# EAGLE board databank (EAGLE 6.4)
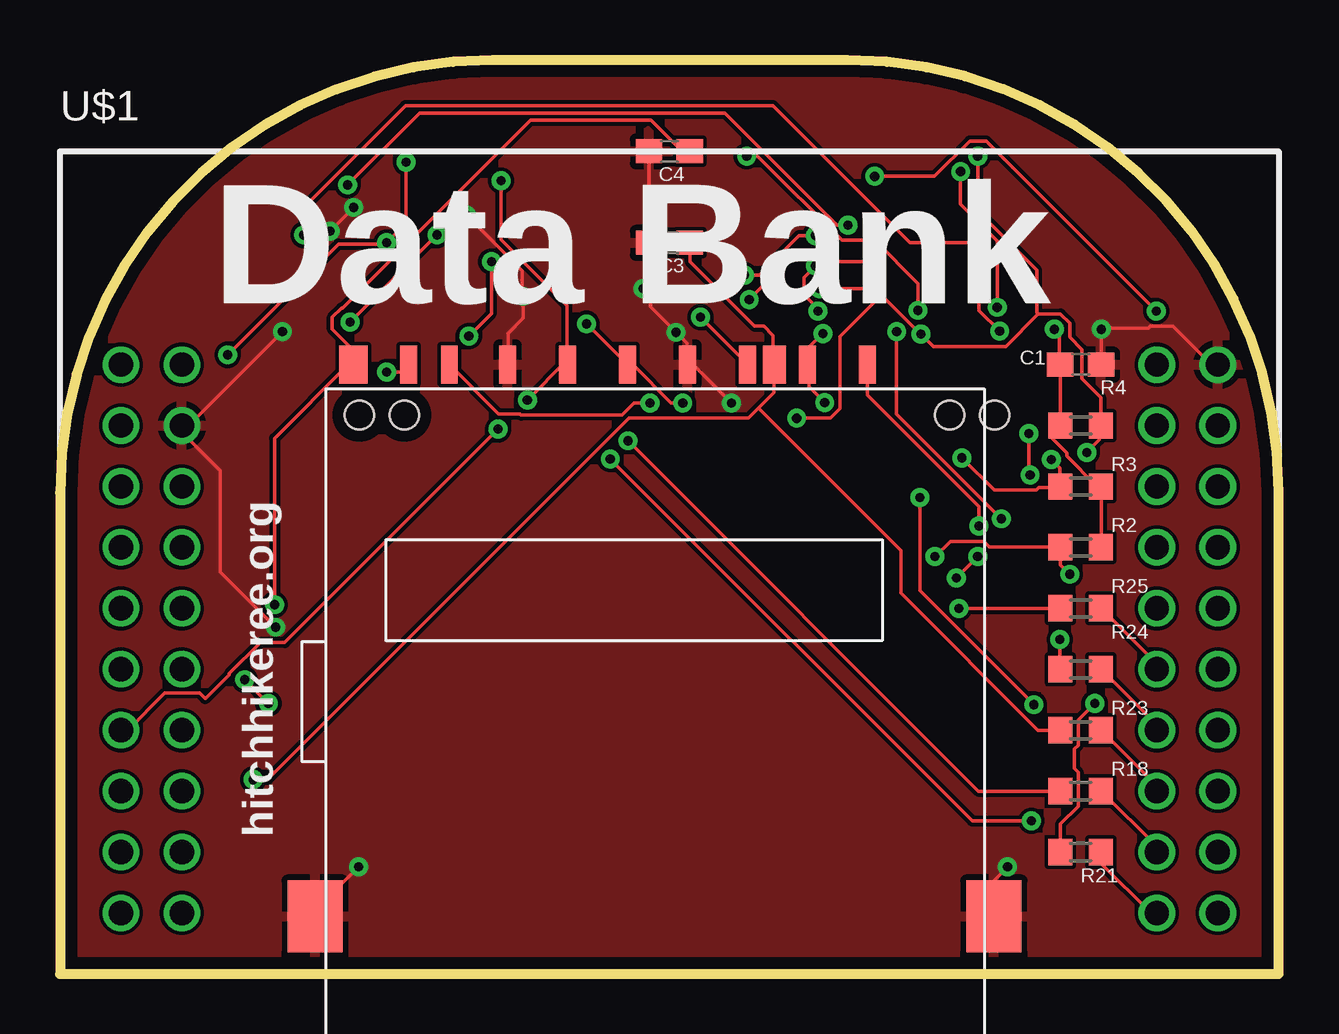
[diagram p0: board, top side]
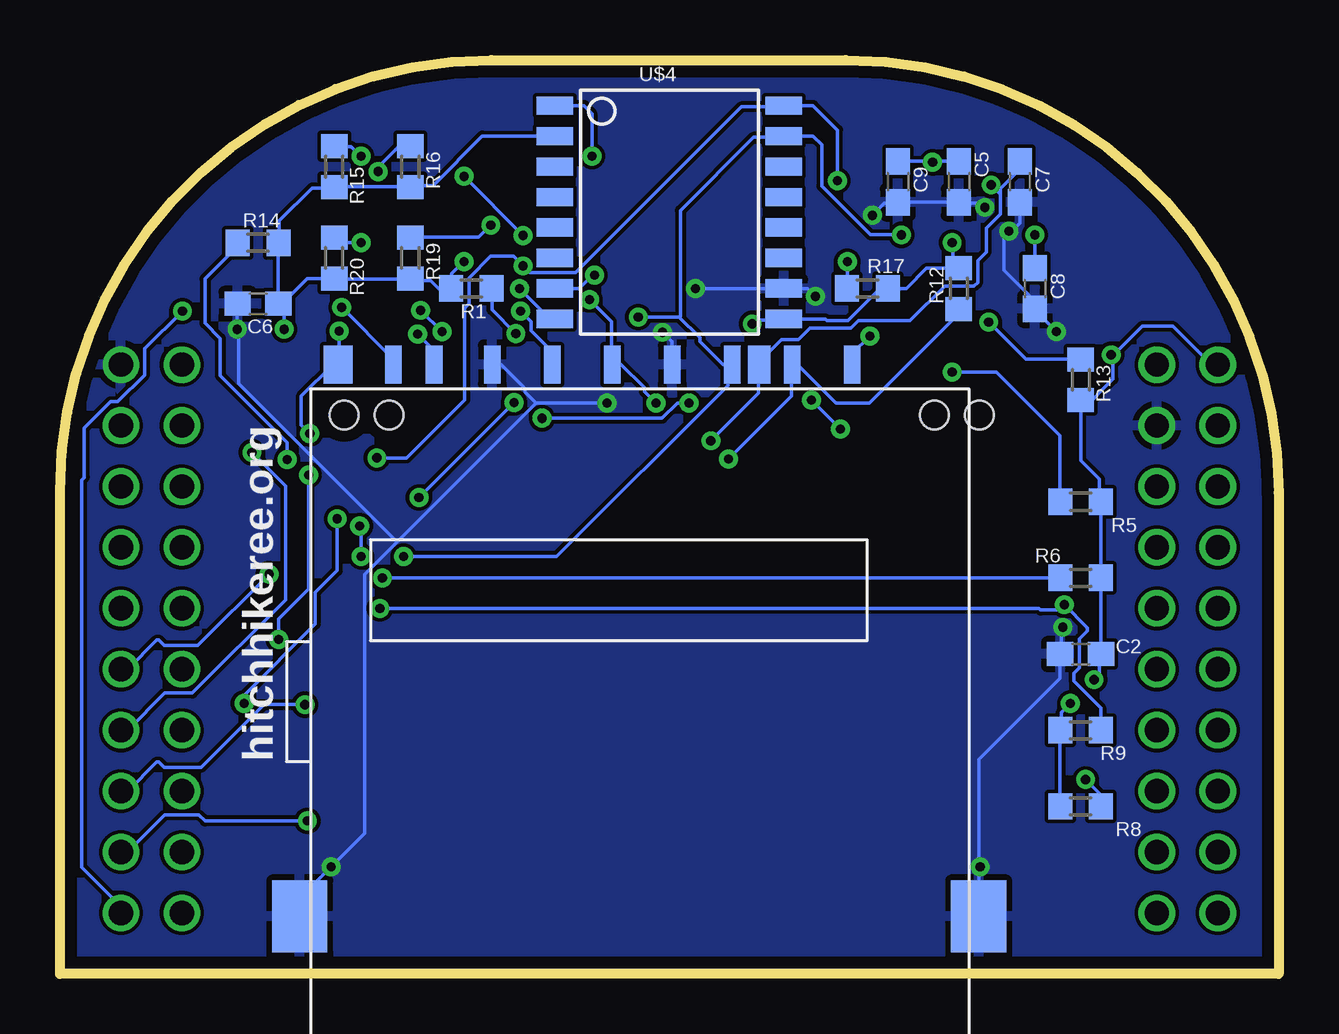
[diagram p1: board, bottom side, seen from below]

Size 50.8 x 38.1 mm. Coordinates in mm from the lower left corner, seen from the top.
Outline: 50.8,0 50.8,20.12 arc90 32.82,38.1 18.05,38.1 arc90 0,20.05 0,0 50.8,0
Copper layers (1*16): Top 0.035mm / dielectric 1.5mm / Bottom 0.035mm
Design rules "default *": minimum track width 6mil, minimum drill 15mil, track to track 6mil, track to pad 6mil, pad to pad 6mil, via to via 6mil, smd to smd 6mil, copper to edge 20mil, drill to drill 6mil, minimum pad ring 10mil, minimum via ring 8mil, stop-mask expansion 4mil, vias tented up to drill 25mil, thermal gap 10mil
Net classes: 0 default: width 0.152 mm, drill 0.381 mm, clearance 0.152 mm; 1 pwr: width 0.305 mm, drill 0.381 mm, clearance 0.152 mm

## Footprints (pad centres in the part's own frame; a part is rotated, then mirrored left to right if it is on the bottom)
C0603 = smd 1.1 x 1: 1 -0.85,0; 2 0.85,0
R0603 = smd 1 x 1.1: 1 -0.85,0; 2 0.85,0
LAUNCHPAD_BOOSTER_PACK = drill 1.016: 5V -20.32,8.89; AN@ -20.32,1.27; AN@1 -20.32,3.81; AN@3 -20.32,-1.27; AN@4 -20.32,-3.81; AN@5 -20.32,-6.35; AN@6 -20.32,-8.89; AN@7 -20.32,-11.43; AN@8 -20.32,-13.97; AN_IN -22.86,6.35; GND@1 -20.32,6.35; GND@2 22.86,8.89; GPIO@1 -22.86,-8.89; GPIO@2 -22.86,-11.43; GPIO@3 -22.86,-13.97; GPIO@4 22.86,-8.89; GPIO@5 22.86,-11.43; GPIO@6 22.86,-13.97; GPIO_INT@1 -22.86,-1.27; GPIO_INT@2 22.86,3.81; RESET 22.86,-1.27; SPIA_SCLK -22.86,-3.81; SPIB_SCLK -22.86,-6.35; SPIB_SIMO/I2C_SDA 22.86,-3.81; SPIB_SOMI/I2C_SCL 22.86,-6.35; TEST 22.86,1.27; TIM@1 20.32,8.89; TIM@2 20.32,6.35; TIM@3 20.32,3.81; TIM@4 20.32,1.27; TIM@5 20.32,-1.27; TIM@6 20.32,-3.81; TIM@7 20.32,-6.35; TIM@8 20.32,-8.89; TIM@9 20.32,-11.43; TIM@10 20.32,-13.97; TIM_OUT 22.86,6.35; UART_HW_RX -22.86,3.81; UART_HW_TX -22.86,1.27; VCC -22.86,8.89
101-00405-75 = smd 0.7 x 1.6: 1 -2.5,0; 2 -5,0; 3 -7.5,0; 4 -10,0; 5 -12.5,0; 6 -15,0; 7 -17.425,0; 8 -19.125,0; 9 0,0 | smd 0.95 x 1.6: CD -3.875,0 | smd 2.3 x 3: G1$GND -23.025,-23; G2$GND 5.275,-23 | smd 1.2 x 1.6: WP -21.43,0 | hole 1.2: -21.175,-2.1; 3.425,-2.1
SO-16LD = smd 0.762 x 1.524: 1 -4.445,-4.775; 2 -3.175,-4.775; 3 -1.905,-4.775; 4 -0.635,-4.775; 5 0.635,-4.775; 6 1.905,-4.775; 7 3.175,-4.775; 8 4.445,-4.775; 9 4.445,4.775; 10 3.175,4.775; 11 1.905,4.775; 12 0.635,4.775; 13 -0.635,4.775; 14 -1.905,4.775; 15 -3.175,4.775; 16 -4.445,4.775

## Placement (x,y rotation side)
C1  0.1u  [C0603]  42.55,25.4 0 top
C2  10u  [C0603]  8.26,13.33 180 bottom
C3  0.1u  [C0603]  25.4,30.48 180 top
C4  0.1u  [C0603]  25.4,34.29 180 top
C5  0.1u  [C0603]  13.34,33.02 270 bottom
C6  10u  [C0603]  42.55,27.94 180 bottom
C7  0.1u  [C0603]  10.8,33.02 270 bottom
C8  0.1u  [C0603]  10.16,28.57 270 bottom
C9  0.1u  [C0603]  15.88,33.02 270 bottom
R1  10K  [R0603]  33.66,28.57 180 bottom
R2  10K  [R0603]  42.55,17.78 0 top
R3  10K  [R0603]  42.55,20.32 0 top
R4  10K  [R0603]  42.55,22.86 180 top
R5  10K  [R0603]  8.26,19.69 0 bottom
R6  10K  [R0603]  8.26,16.51 0 bottom
R8  10K  [R0603]  8.26,6.98 180 bottom
R9  10K  [R0603]  8.26,10.16 180 bottom
R12  10K  [R0603]  13.34,28.57 90 bottom
R13  10K  [R0603]  8.26,24.77 270 bottom
R14  10K  [R0603]  42.55,30.48 0 bottom
R15  10K  [R0603]  39.37,33.65 270 bottom
R16  10K  [R0603]  36.2,33.65 270 bottom
R17  10K  [R0603]  17.14,28.57 0 bottom
R18  33  [R0603]  42.55,7.62 0 top
R19  10K  [R0603]  36.2,29.84 270 bottom
R20  10K  [R0603]  39.37,29.84 270 bottom
R21  33  [R0603]  42.55,5.08 0 top
R23  33  [R0603]  42.55,10.16 0 top
R24  33  [R0603]  42.55,12.7 0 top
R25  33  [R0603]  42.55,15.24 0 top
U$1  [LAUNCHPAD_BOOSTER_PACK]  25.4,16.51 0 top
U$2  101-00405-75  [101-00405-75]  33.66,25.4 0 top
U$3  101-00405-75  [101-00405-75]  17.78,25.4 0 bottom
U$4  [SO-16LD]  25.4,31.75 270 bottom

## Library data of the parts
C1 C3-C5 C7-C9 = rcl; MPN: VJ0603V104ZXXCW1BC
C2 C6 = rcl; MPN: LMK107BBJ106MALT
R1-R6 R8 R9 R12-R17 R19 R20 = rcl; MPN: WR06X1002FTL
R18 R21 R23-R25 = rcl; MPN: CR0402-JW-330GLF
U$1 = Boards
U$2 U$3 = launchpad_bp; MPN: 101-00405-75
U$4 = launchpad_bp; MPN: MX25L25635E

## Nets
+3V3: C1.1 C2.1 C5.1 C6.1 C9.1 R1.2 R2.2 R3.2 R4.2 R5.2 R6.2 R8.2 R9.2 R12.2 R13.2 R14.2 R15.2 R16.2 R17.2 R19.2 R20.2 U$1.VCC U$2.4 U$3.4 U$4.2 U$4.9
+5V: U$1.5V
FLASH_!CS: U$1.GPIO@6 U$4.7
FLASH_!HOLD: R21.1 U$4.1
GND: C1.2 C2.2 C3.2 C4.2 C5.2 C6.2 C7.2 C8.2 C9.2 U$1.GND@1 U$1.GND@2 U$2.3 U$2.6 U$2.G1$GND U$2.G2$GND U$3.3 U$3.6 U$3.G1$GND U$3.G2$GND U$4.10
MISO: R4.1 R15.1 U$1.SPIB_SOMI/I2C_SCL U$2.7 U$3.7 U$4.8
MOSI: R2.1 R13.1 U$1.SPIB_SIMO/I2C_SDA U$2.2 U$3.2 U$4.15
N$2: R16.1 U$3.8
N$3: R17.1 U$3.9
N$5: R5.1 U$2.8
N$6: R6.1 U$2.9
N$8: R21.2 U$1.TIM@10
N$9: R18.2 U$1.TIM@9
N$11: R23.2 U$1.TIM@8
N$12: R24.2 U$1.TIM@7
N$13: R25.2 U$1.TIM@6
SCLK: R3.1 R14.1 U$1.SPIB_SCLK U$2.5 U$3.5 U$4.16
SD0_!CD: C3.1 R8.1 R23.1 U$2.CD
SD0_!CS: R1.1 U$1.GPIO@4 U$2.1
SD0_!WP: C4.1 R9.1 R25.1 U$2.WP
SD1_!CD: C7.1 R18.1 R19.1 U$3.CD
SD1_!CS: R12.1 U$1.GPIO@5 U$3.1
SD1_!WP: C8.1 R20.1 R24.1 U$3.WP

## Tracks (layer width: path | path; a pad name or v marks a point on that pad's centre or on a via)
+3V3  (via drill 0.38)
  Top 0.152: R2.2 43.41,17.78 43.41,20.32 R3.2 43.33,20.34 43.2,20.34 41.96,21.59 41.96,21.72 41.3,22.38 41.3,22.53 41.63,22.86 R4.2 41.71,22.86 41.71,25.4 C1.1 41.66,25.45 41.66,26.67 v41.45,26.87 | v21.95,27.1 U$2.4 23.72,25.38 23.9,25.38 25.48,23.8 v25.96,23.8 | v14.43,33.83 14.43,31.29 v13.61,30.48 13.56,30.43 11.61,30.43 v6.98,25.81 | v7.7,12.27 v8.69,11.28 | v33.96,29.69 32.21,29.69 31.75,30.15 30.76,30.15 v28.73,28.12
  Bottom 0.152: U$4.2 33.2,34.92 35.26,32.87 36.14,32.87 R16.2 36.2,32.82 39.37,32.82 R15.2 39.42,32.77 40.28,32.77 41.66,31.39 41.66,30.53 R14.2 41.71,30.48 41.71,27.94 C6.1 | C6.1 41.66,28.27 41.2,28.27 40.49,28.98 39.37,28.98 R20.2 39.32,28.96 36.25,28.96 R19.2 36.2,28.98 36.12,28.9 35.36,28.9 35.03,28.57 R1.2 34.47,28.63 34.47,29.18 v33.96,29.69 | v41.45,26.87 41.45,28.22 C6.1 | 14.43,33.88 15.88,33.88 C9.1 | 14.43,33.88 13.34,33.88 C5.1 | v21.95,27.1 21.79,27.25 20.68,27.25 U$4.9 18.9,27.3 18.82,27.23 17.96,27.23 16.64,28.55 16.36,28.55 R17.2 15.52,28.57 14.68,29.41 13.34,29.41 R12.2 13.59,29.46 13.59,30.45 v13.61,30.48 | v25.96,23.8 26.44,24.28 26.44,24.43 27.41,25.4 U$3.4 27.81,25.45 27.81,27.2 v28.73,28.12 | v14.43,33.83 14.43,33.88 | R8.2 9.12,6.98 9.12,10.16 R9.2 9.07,10.21 9.07,10.9 v8.69,11.28 | v7.7,12.27 7.47,12.5 7.47,13.28 C2.1 7.42,13.33 7.42,16.51 R6.2 7.42,16.56 7.42,19.69 R5.2 7.47,19.74 7.47,20.62 8.26,21.41 R13.2 8.2,23.49 6.91,24.79 6.91,25.78 | U$1.VCC 2.82,25.4 4.42,27 5.69,27 6.91,25.78 | v6.98,25.81 6.96,25.81 6.91,25.78
FLASH_!CS  (via drill 0.38)
  Top 0.152: v28.52,29.13 29.16,29.13 30.81,30.78 v31.5,30.78 | v33.96,33.25 36.45,33.25 37.92,34.72 38.61,34.72 v45.69,27.63
  Bottom 0.152: U$4.7 29.16,28.57 28.6,29.13 v28.52,29.13 | v33.96,33.25 v31.5,30.78 | v45.69,27.63 47.27,26.06 47.27,24.97 48.39,23.85 48.69,23.85 49.78,22.76 49.78,20.7 49.89,20.6 49.89,4.44 48.26,2.82 U$1.GPIO@6
FLASH_!HOLD  (via drill 0.38)
  Top 0.152: v43.13,11.28 42.44,10.59 42.44,9.53 42.29,9.37 42.29,8.56 42.44,8.41 42.44,6.98 41.71,6.25 41.71,5.08 R21.1 | v39.24,18.97 34.87,23.34 v34.87,26.77 | v35.76,27.66 35.76,28.78 33.96,30.58 32.59,30.58 29.08,34.09 v28.63,34.09
  Bottom 0.152: v43.13,11.28 43.13,11.61 40.16,14.58 40.16,15.9 39.24,16.81 v39.24,18.97 | v35.76,27.66 v34.87,26.77 | v28.63,34.09 28.63,35.86 28.96,36.2 U$4.1
GND  (via drill 0.38)
  Top 0.152: U$2.G1$GND 10.67,2.49 10.67,2.69 v12.45,4.47 | v11.25,30.96 v12.24,31.95 | v9.27,26.77 5.36,22.86 U$1.GND@1 5.41,22.81 5.41,22.25 6.68,20.98 6.68,16.76 v8.99,14.45 | C1.2 43.41,25.4 v43.41,26.87 43.46,26.92 45.36,26.92 45.44,27 46.38,27 47.98,25.4 U$1.GND@2 | U$2.G2$GND 38.94,2.49 38.94,3.91 v39.5,4.47 | U$2.6 18.67,25.4 18.67,26.7 19.3,27.33 v19.3,28.24 19.25,28.3 19.25,29.31 v16.94,31.62 | C4.2 24.56,34.29 24.56,30.48 C3.2 24.61,30.43 24.61,28.57 | v27.99,23.8 26.19,25.6 U$2.3 26.14,25.4 26.14,26.29 v25.68,26.75 24.61,27.81 24.61,28.57 | 24.61,28.57 v24.31,28.57
  Bottom 0.152: 12.5,4.47 U$3.G2$GND 12.52,2.41 | 12.5,4.47 12.5,8.94 9.12,12.32 9.12,13.33 C2.2 9.07,13.39 9.07,14.38 v8.99,14.45 | v12.45,4.47 12.5,4.47 | 11.18,30.91 10.8,31.29 C7.2 | 11.18,30.91 11.45,30.63 11.45,29.34 10.16,28.04 C8.2 10.16,27.66 v9.27,26.77 | v12.24,31.95 12.42,32.13 13.28,32.13 C5.2 13.34,32.18 15.88,32.18 C9.2 15.93,32.13 16.43,32.13 v16.94,31.62 | v11.25,30.96 11.23,30.96 11.18,30.91 | C6.2 43.41,27.94 v43.41,26.87 43.36,26.82 43.36,24.61 36.75,18.01 | 40.82,2.41 U$3.G1$GND 40.79,2.41 40.79,3.17 v39.5,4.47 38.1,5.87 38.1,16.66 36.75,18.01 | v19.3,28.24 19.63,28.57 U$4.10 v24.31,28.57 | v25.68,26.75 25.3,26.36 25.3,25.4 U$3.3 | U$3.6 32.41,25.4 31.42,24.41 31.42,24.26 30.96,23.8 | v27.99,23.8 30.96,23.8 | 30.96,23.8 36.75,18.01
  pour Top: -24.13,49.45 75.72,49.45 75.72,-7.85 -25.27,-7.85 -25.27,49.56
  pour Bottom: -24.26,48.54 76.02,48.54 76.02,-7.95 -24.87,-7.95 -24.87,48.23
MISO  (via drill 0.38)
  Top 0.152: 40.77,27.51 41.71,27.51 42.09,27.13 42.09,26.54 42.6,26.03 42.6,24.82 43.38,24.03 43.38,22.86 R4.1 43.33,22.81 43.33,22.28 v42.8,21.74 | 40.77,27.51 39.42,26.16 36.4,26.16 v35.89,26.67 35.84,26.7 34.24,28.3 | v38.25,34.09 38.25,31.8 40.72,29.34 40.72,27.56 40.77,27.51 | v31.65,28.57 33.96,28.57 34.24,28.3 | v24.59,23.8 23.93,23.8 23.42,23.29 19.23,23.29 19.18,23.34 18.29,23.34 U$2.7 | v30.71,23.16 32.11,23.16 32.51,23.57 32.51,26.57 34.24,28.3
  Bottom 0.152: v35.89,26.67 35.23,26.01 35.23,25.4 U$3.7 | v38.25,34.09 38.66,34.49 39.37,34.49 R15.1 | U$4.8 30.38,27.3 v31.65,28.57 | v24.59,23.8 25.07,23.8 25.7,23.16 v30.71,23.16 | U$1.SPIB_SOMI/I2C_SCL 47.98,10.16 46.43,11.71 45.29,11.71 41.4,15.6 41.4,20.34 v42.8,21.74
MOSI  (via drill 0.38)
  Top 0.152: v42.09,16.66 41.71,17.04 41.71,17.78 R2.1 41.63,17.8 38.73,17.8 38.51,18.03 37.11,18.03 v36.47,17.4 | v26.7,27.38 28.68,25.4 U$2.2 | v15.72,30.81 v12.09,27.18
  Bottom 0.152: v42.09,16.66 45.06,13.69 46.46,13.69 46.69,13.92 46.76,13.92 47.98,12.7 U$1.SPIB_SIMO/I2C_SDA | 24.99,27.38 24.13,26.52 24.13,26.36 23.16,25.4 U$3.2 22.96,25.35 22.96,24.54 30.1,17.4 v36.47,17.4 | v26.7,27.38 24.99,27.38 | v12.09,27.18 10.54,25.63 8.26,25.63 R13.1 | v15.72,30.81 17.02,30.81 19.05,32.84 19.05,34.57 19.41,34.92 U$4.15 20.68,34.87 21.89,34.87 24.94,31.83 24.94,27.43 24.99,27.38
N$2  (via drill 0.38)
  Top 0.152: v37.54,33.45 37.54,32.08 39.06,30.56 v39.06,27.79
  Bottom 0.152: v37.54,33.45 37.54,33.63 36.68,34.49 36.2,34.49 R16.1 | v39.06,27.79 36.91,25.63 U$3.8
N$3  (via drill 0.38)
  Top 0.152: v17.98,29.69 17.98,27.53 v17.04,26.59
  Bottom 0.152: v17.98,29.69 17.98,28.57 R17.1 | v17.04,26.59 17.78,25.86 U$3.9
N$5  (via drill 0.38)
  Top 0.152: v13.61,25.09 14.22,25.09 U$2.8
  Bottom 0.152: v13.61,25.09 11.76,25.09 9.12,22.45 9.12,19.69 R5.1
N$6  (via drill 0.38)
  Top 0.152: v38.25,17.4 v37.36,16.51 | v38.3,18.67 38.3,19.48 33.66,24.13 U$2.9
  Bottom 0.152: v37.36,16.51 R6.1 | v38.25,17.4 38.25,18.62 v38.3,18.67
N$8
  Top 0.152: U$1.TIM@10 45.47,2.54 43.41,4.6 43.41,5.08 R21.2
N$9
  Top 0.152: U$1.TIM@9 45.72,5.31 43.41,7.62 R18.2
N$11
  Top 0.152: U$1.TIM@8 45.72,7.85 43.41,10.16 R23.2
N$12
  Top 0.152: U$1.TIM@7 45.72,10.39 43.41,12.7 R24.2
N$13
  Top 0.152: U$1.TIM@6 45.72,12.93 43.41,15.24 R25.2
SCLK  (via drill 0.38)
  Top 0.152: v41.33,21.44 41.68,21.08 41.68,20.32 R3.1 41.63,20.27 40.79,20.27 40.69,20.17 38.94,20.17 v37.59,21.51 | v18.39,33.07 18.39,30.61 21.13,27.86 21.13,25.4 U$2.5 21.08,25.53 v19.48,23.93 | v31.6,27.63 31.6,27.74 31.01,28.32 31.01,29.03 v31.5,29.52 | U$1.SPIB_SCLK 2.82,10.16 4.37,11.71 5.82,11.71 6.04,11.48 6.07,11.48 7.06,12.47 7.06,12.52 8.36,13.82 9.37,13.82 v18.26,22.71
  Bottom 0.152: v41.33,21.44 41.33,22.15 44.12,24.94 44.12,26.49 44.75,27.13 44.75,28.98 43.41,30.33 43.41,30.48 R14.1 | v18.39,33.07 18.39,35.18 19.41,36.2 U$4.16 20.68,36.14 22.4,36.14 29.31,29.23 31.22,29.23 v31.5,29.52 31.9,29.92 32.84,29.92 33.76,29.01 33.76,27.94 33.93,27.76 33.93,23.93 36.35,21.51 v37.59,21.51 | v31.6,27.63 31.17,27.2 31.17,26.82 30.3,25.96 30.3,25.4 U$3.5 | v19.48,23.93 v18.26,22.71
SD0_!CD  (via drill 0.38)
  Top 0.152: v8.05,8.1 8.66,8.1 23.72,23.16 28.7,23.16 29.12,23.58 | 29.12,23.58 29.77,24.23 29.77,25.4 U$2.CD 29.72,25.45 29.72,26.62 29.34,27 28.96,27 26.26,29.69 C3.1 | R23.1 40.77,10.16 35.05,15.87 35.05,17.65 29.12,23.58
  Bottom 0.152: v8.05,8.1 7.42,7.47 7.42,6.98 R8.1
SD0_!CS  (via drill 0.38)
  Top 0.152: v31.8,26.7 31.17,26.06 U$2.1 31.22,25.35 31.22,24.49 v31.88,23.82 | v35.84,19.86 35.84,15.98 v40.59,11.23
  Bottom 0.152: v31.8,26.7 32.79,27.69 32.79,28.57 R1.1 | v35.84,19.86 v31.88,23.82 | v40.59,11.23 42.29,11.23 44.91,8.61 46.46,8.61 46.69,8.84 46.76,8.84 47.98,7.62 U$1.GPIO@4
SD0_!WP  (via drill 0.38)
  Top 0.152: v8.94,15.39 8.94,22.33 12.01,25.4 U$2.WP 12.09,25.45 12.09,26.14 11.35,26.87 11.35,27.38 11.73,27.76 11.79,27.76 19.61,35.59 24.64,35.59 25.93,34.29 C4.1 | v37.46,15.24 R25.1
  Bottom 0.152: R9.1 7.42,10.16 7.42,11.1 8.53,12.22 8.53,12.52 8.31,12.75 8.31,13.97 7.98,14.3 7.98,14.43 v8.94,15.39 8.81,15.16 9.93,15.16 10.01,15.24 v37.46,15.24
SD1_!CD  (via drill 0.38)
  Top 0.152: R18.1 38.28,7.62 v23.67,22.23 | v32.84,31.22 32.38,31.22 27.71,35.89 14.99,35.89 v11.99,32.89
  Bottom 0.152: C7.1 10.8,33.55 11.61,32.74 11.61,32.56 | 11.61,32.56 11.61,31.67 12.19,31.09 12.19,30.1 12.55,29.74 12.55,28.83 12.7,28.68 13.92,28.68 15.37,27.23 17.53,27.23 17.83,26.92 19.53,26.92 20.02,26.44 20.73,26.44 21.64,25.53 21.64,25.4 U$3.CD 21.69,25.35 21.69,24.21 v23.67,22.23 | v32.84,31.22 33.35,30.71 36.2,30.71 R19.1 | v11.99,32.89 11.66,32.56 11.61,32.56
SD1_!CS  (via drill 0.38)
  Top 0.152: v40.49,6.38 38.02,6.38 v22.94,21.46
  Bottom 0.152: R12.1 13.34,27.53 17.07,23.8 18.47,23.8 20.07,25.4 U$3.1 20.32,25.35 20.32,24.08 v22.94,21.46 | U$1.GPIO@5 47.98,5.08 46.43,6.63 45.01,6.63 44.75,6.38 v40.49,6.38
SD1_!WP  (via drill 0.38)
  Top 0.152: v41.68,13.94 41.68,12.7 R24.1 | v40.44,20.8 40.39,20.85 v40.39,22.53 | v10.16,30.81 10.16,31.95 14.4,36.2 29.72,36.2 35.43,30.48 v38.25,30.48 38.3,30.43 38.3,27.66 v39.17,26.8
  Bottom 0.152: v41.68,13.94 41.68,14.81 40.44,16.05 v40.44,20.8 | v40.39,22.53 40.74,22.88 40.74,24.08 39.42,25.4 U$3.WP 39.17,25.45 v39.17,26.8 | v10.16,30.81 C8.1 | v38.25,30.48 39.17,30.48 39.37,30.68 R20.1

## Text on the board
tPlace: Data Bank | hitchhikeree.org
bPlace: hitchhikeree.org